# Altium PCB HoloCubic_211230.PcbDoc
Units mm, origin at the board's own origin, x right, y up, seen from the top; angles counter-clockwise.
Board outline 43 x 29.5 mm, 2 copper layers (Top Layer, Bottom Layer); 31 components, 41 nets, 150 pads, 34 vias.
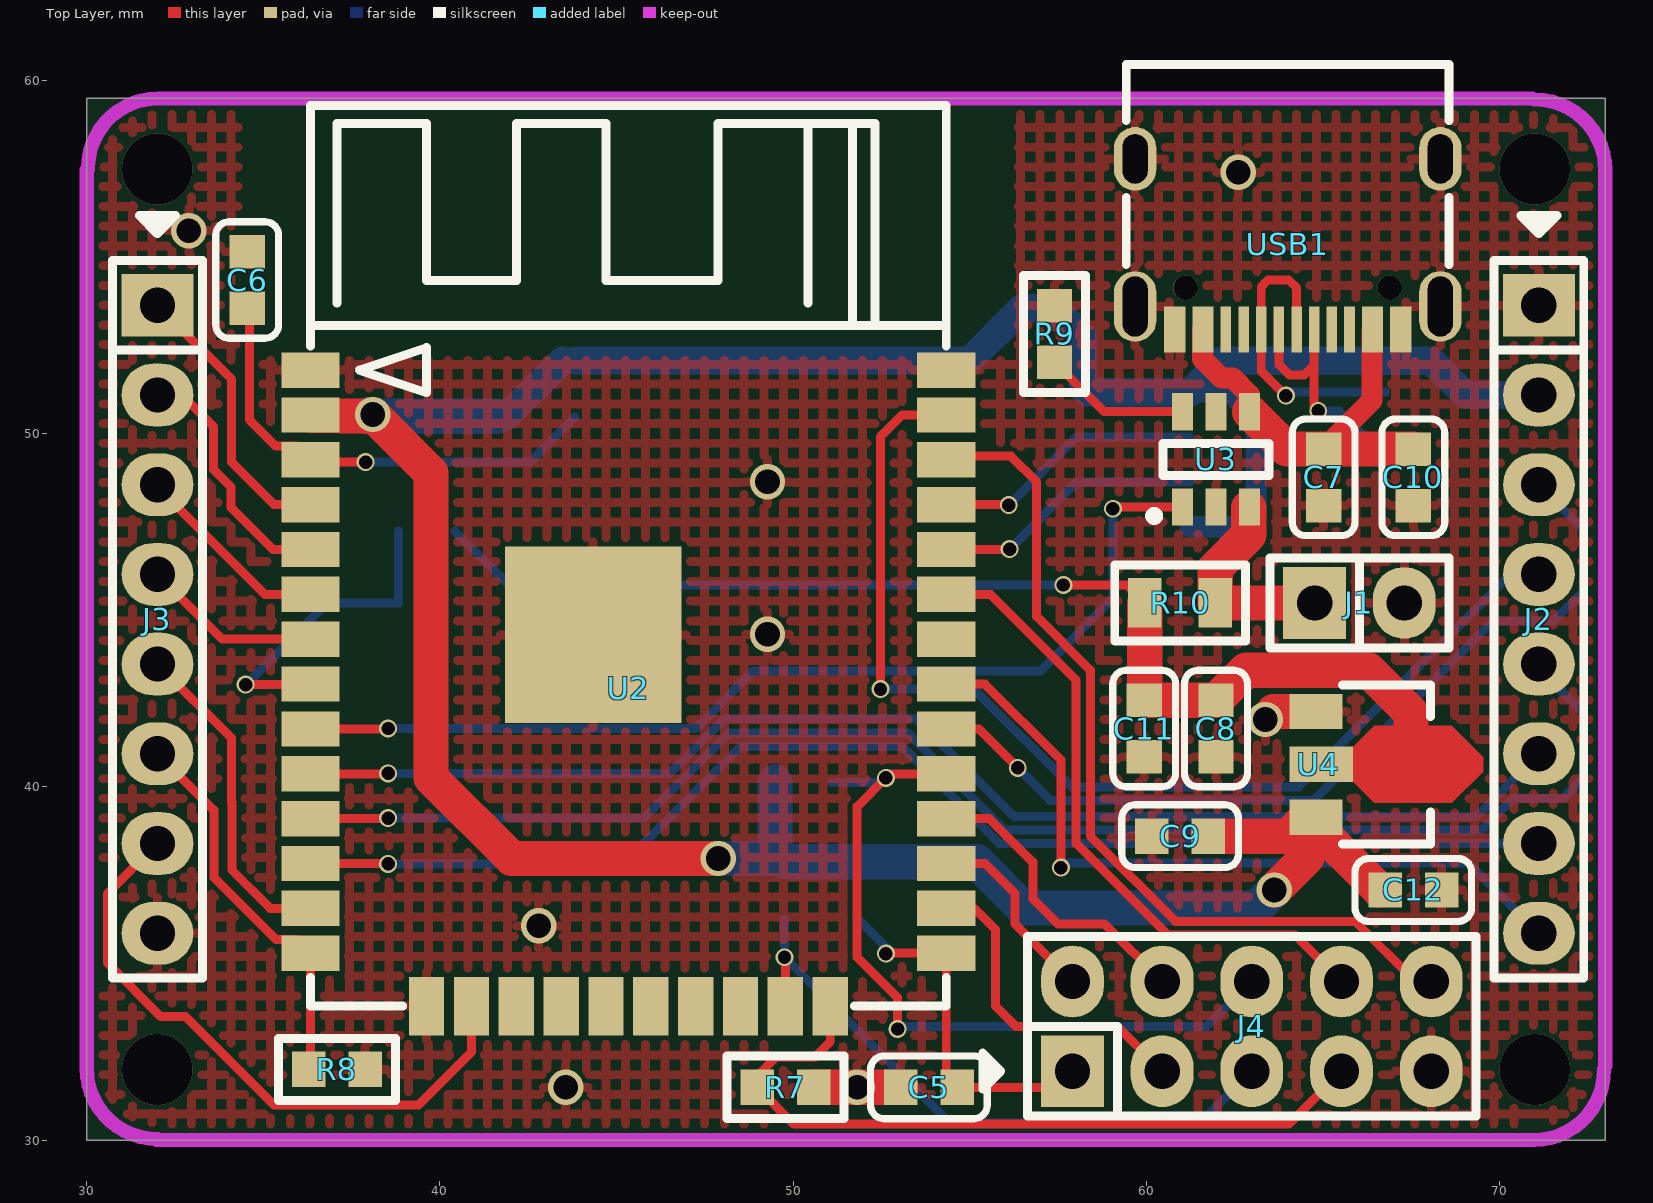
[diagram p0: Top Layer view]
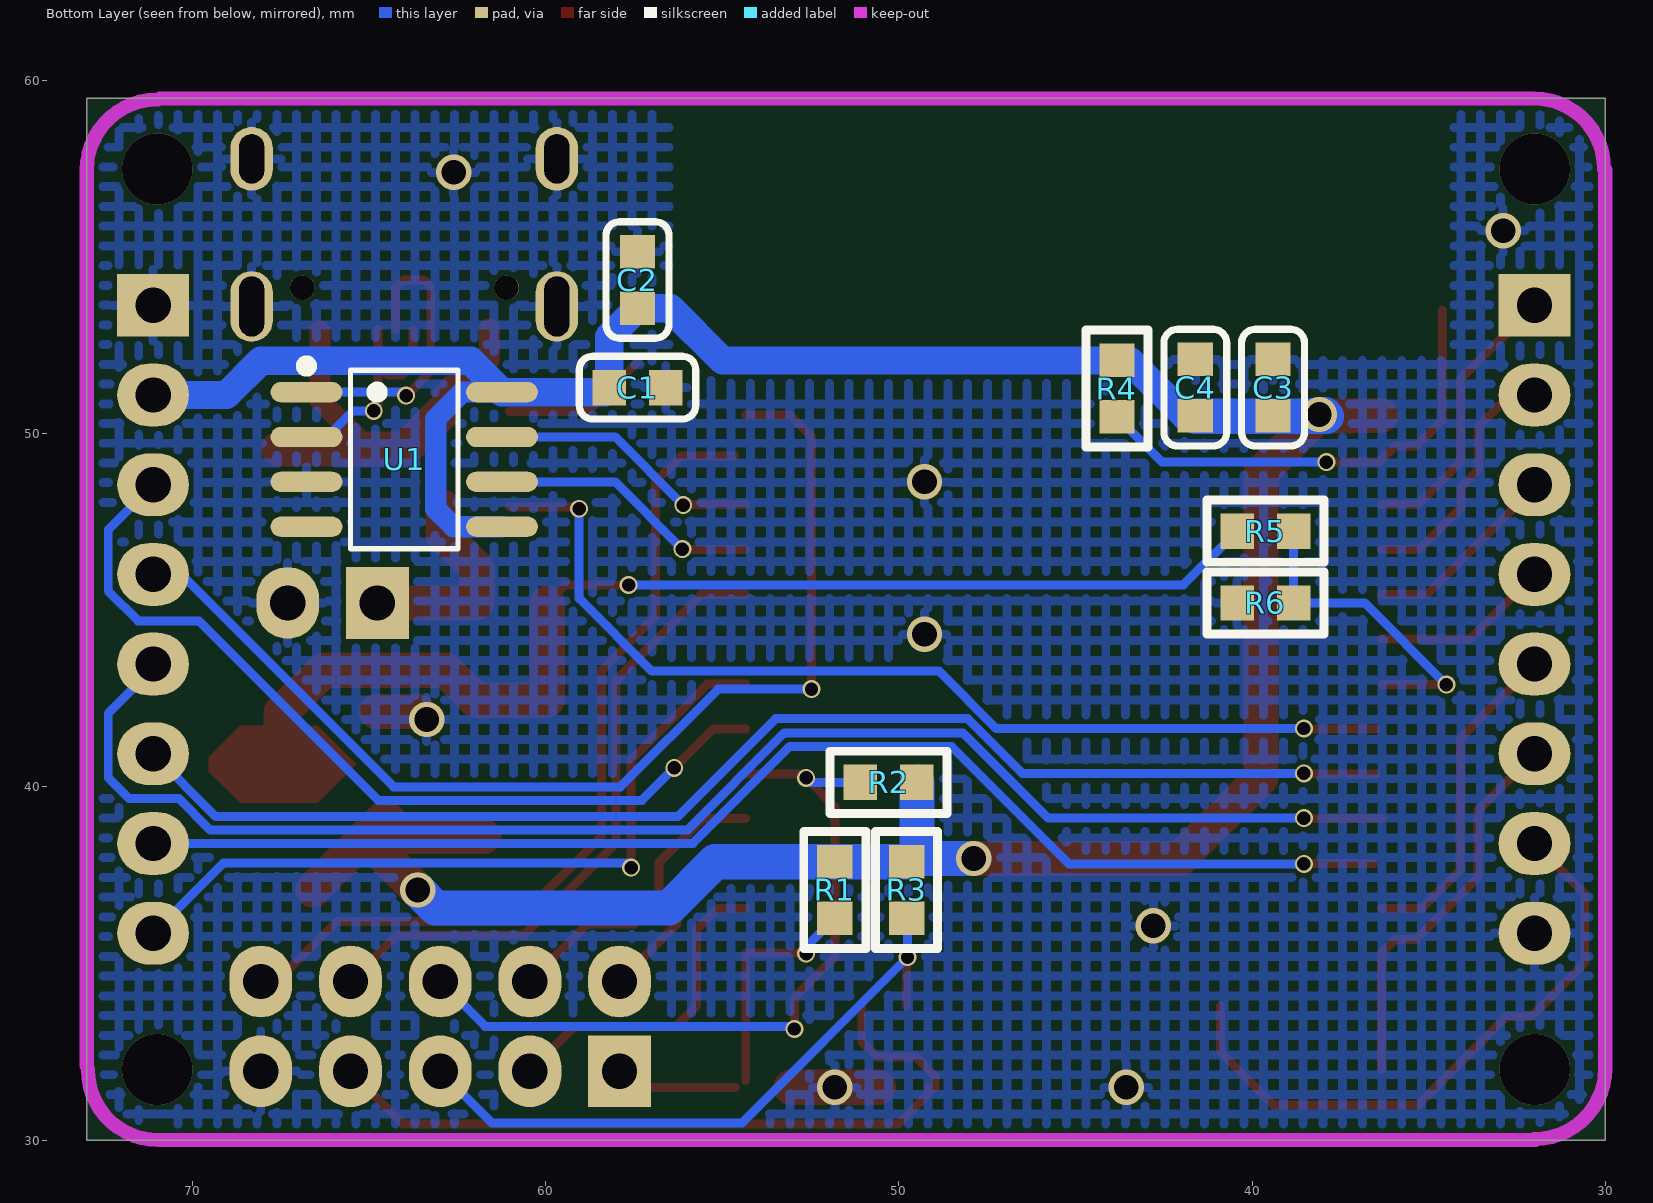
[diagram p1: Bottom Layer view, seen from below]
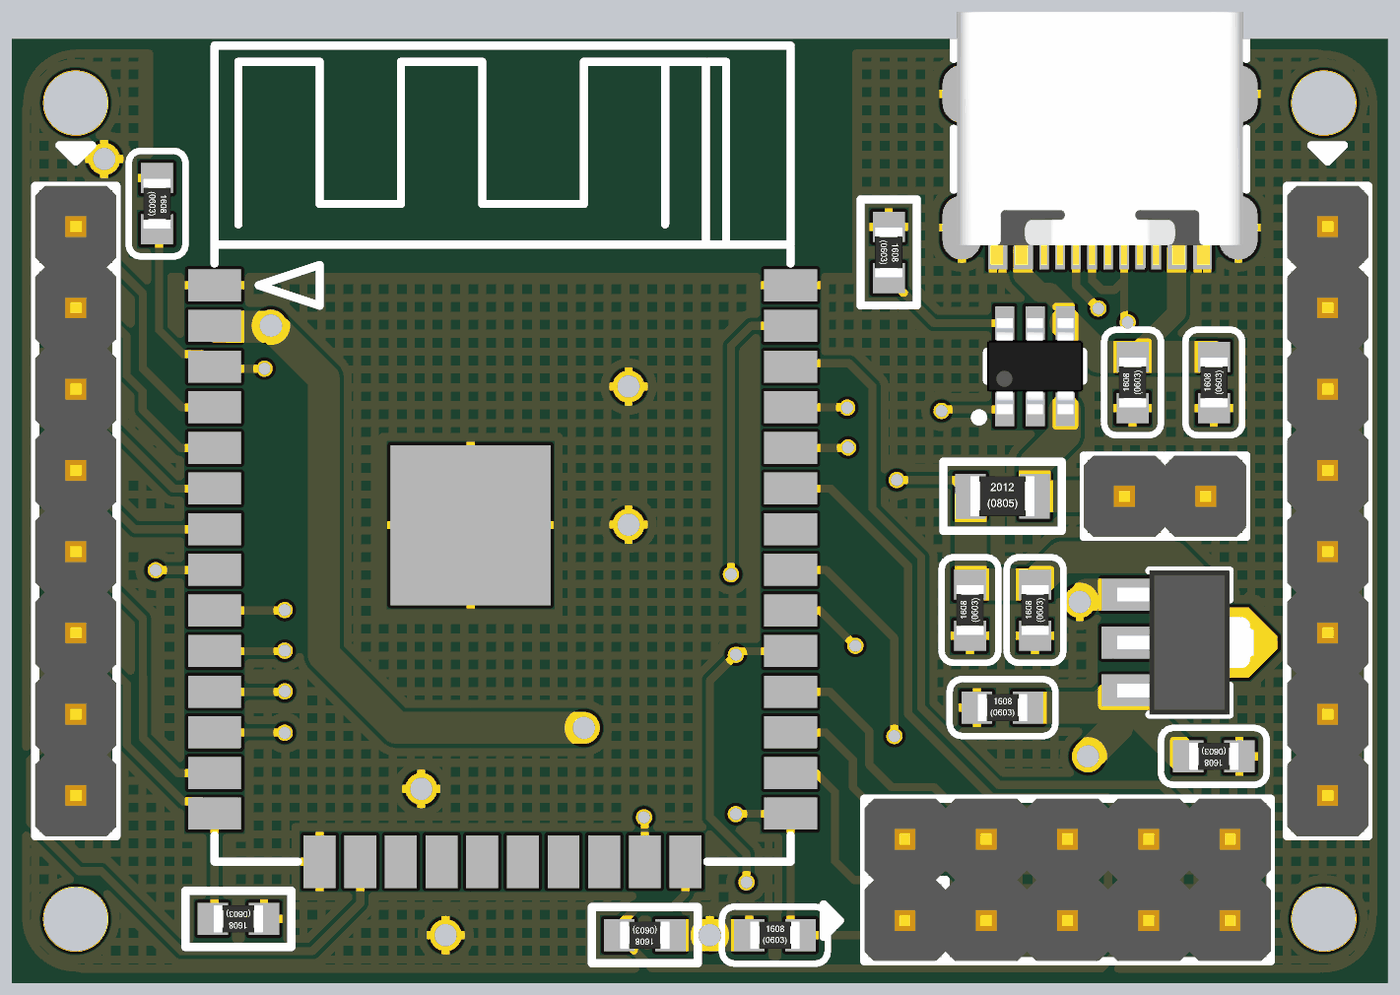
[diagram p2: 3D render of the assembled board from above, using the file's embedded part models]
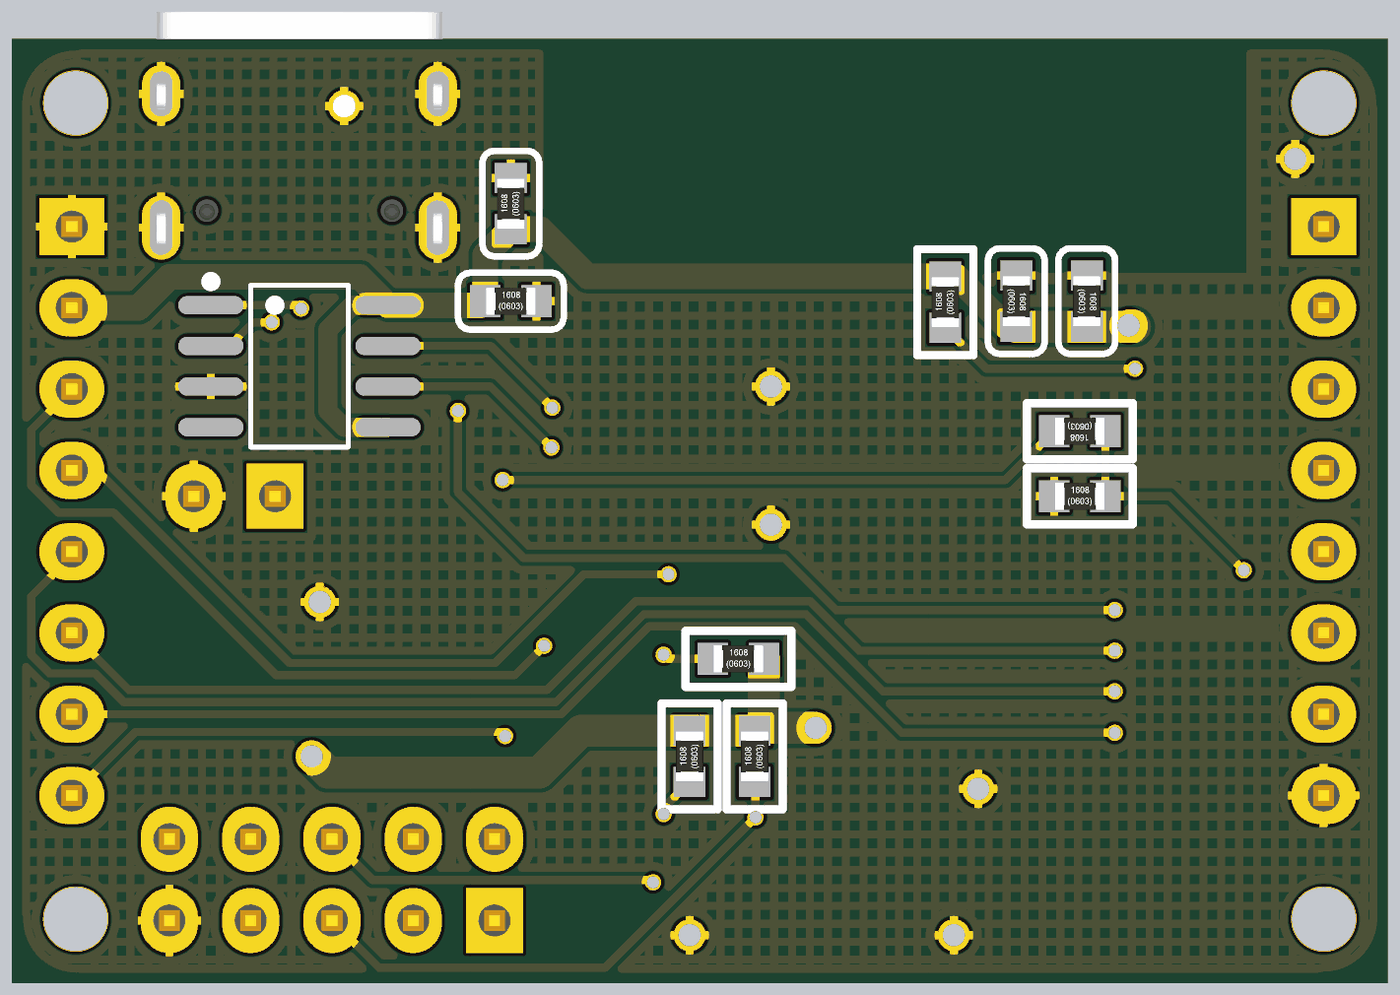
[diagram p3: 3D render of the assembled board from below, using the file's embedded part models]

## Layer stack, top to bottom
Top Layer: signal copper 0.0356
Dielectric: dielectric 0.32, FR-4, Dk 4.8
Bottom Layer: signal copper 0.0356

## Board outline
30,30 30,59.5 73,59.5 73,30

## Design rules (kind name [scope] priority, off if disabled: settings)
Clearance [All] p1: gap=0.127
HoleToHoleClearance [All] p1: gap=0.127 allowstackedmicrovias=TRUE
MinimumSolderMaskSliver [All] p1: minsoldermaskwidth=0.051
PolygonConnect [All] p1: connectstyle=Relief reliefconductorwidth=0.254 reliefentries=4 polygonreliefangle="90 Angle"
RoutingVias [All] p1: holewidth=0.711 width=1.27 viastyle="Through Hole" minholewidth=0.711 minwidth=1.27 maxholewidth=0.711 maxwidth=1.27
SilkToSilkClearance [All] p1: silktosilkclearance=0.127
SilkscreenOverComponentPads [All] p1: minsilkscreentomaskgap=0.076
SolderMaskExpansion [All] p1: expansion=0.102
Width [All] p1: maxlimit=1 minlimit=0.254 preferedwidth=0.254
24 further rules are at their usual default settings.

## Classes and differential pairs
component class HoloCubicCh340n_211230: C1 C2 U1
component class HoloCubicConnect_211230: J1 J2 J3 J4 USB1
component class HoloCubicMCU_211230: C3 C4 C5 C6 R1 R2 R3 R4 R5 R6 R7 R8 U2
component class HoloCubicPower_211230: C7 C8 C9 C10 C11 C12 R9 R10 U3 U4

## Components (designator, comment, footprint, x,y, rotation, side; value= is the part's Value field where it differs from the comment)
C1 "0.1u" C0603 57.404,51.308 r180 bottom
C2 "10u" C0603 57.404,54.356 r90 bottom
C3 "0.1u" C0603 39.408,51.308 r270 bottom
C4 "10u" C0603 41.609,51.308 r270 bottom
C5 "0.1u" C0603 53.848,31.496 r0 top
C6 "0.1u" C0603 34.544,54.356 r270 top
C7 "0.1u" C0603 65.024,48.768 r90 top
C8 "0.1u" C0603 61.976,41.656 r90 top
C9 "0.1u" C0603 60.96,38.608 r0 top
C10 "10u" C0603 67.564,48.768 r90 top
C11 "10u" C0603 59.944,41.656 r90 top
C12 "10u" C0603 67.564,37.084 r180 top
J1 "HDR1x2" PIN-2-2.54-1.0 66.04,45.212 r0 top
J2 "HDR1x8" PIN-8-2.54-1.0 71.12,44.75 r270 top
J3 "HDR1x8" PIN-8-2.54-1.0 32.004,44.75 r270 top
J4 "HDR2x5" PIN-2x5-2.54-1.0 62.992,33.223 r0 top
R1 "10k" R0603 51.816,37.084 r90 bottom
R2 "10k" R0603 50.292,40.132 r180 bottom
R3 "10k" R0603 49.784,37.084 r90 bottom
R4 "10k" R0603 43.827,51.278 r90 bottom
R5 "10k" R0603 39.624,47.244 r0 bottom
R6 "10k" R0603 39.624,45.212 r180 bottom
R7 "10k" R0603 49.784,31.496 r180 top
R8 "10k" R0603 37.084,32.004 r180 top
R9 "4.7k" R0603 57.404,52.832 r270 top
R10 "0R" R0805 60.96,45.212 r0 top
U1 "CH340N" SOP-8_L5.0-W4.0-P1.27-LS6.0-BL 64.008,49.276 r270 bottom
U2 "ESP32-WROOM-32" WIFIM-SMD_ESP-32S 44.704,44.704 r270 top
U3 "TP4059" SOT-23-6 61.976,49.276 r0 top
U4 "HT7333-3" SOT-89 66.802,40.64 r270 top
USB1 "KH-TYPE-C-16P" USB-C-SMD_KH-TYPE-C-16P 64.008,55.372 r180 top

## Footprints (in the part's own frame and the unit in brackets; to place one, negate y for a bottom-side part, rotate by r counter-clockwise, add the part's x,y. Pads: shape width x height; smd on the part's side, far side on the other; paste and mask are expansions set on the pad)
C0603 [mm] "SMD, 0603"
  rect 0.95x1 smd: 1(-0.8,0) 2(0.8,0)
  silkscreen extent -1.65,-0.89 1.65,0.89, body extent -0.77,-0.43 0.77,0.43, height 0.45
PIN-2-2.54-1.0 [mil] "Pin Header"
  rect 70x80 hole 39.37: 1(-50,0)
  oval 70x80 hole 39.37: 2(50,0)
  silkscreen extent -100,-50 100,50, body extent -100,-50 100,50, height 398
PIN-2x5-2.54-1.0 [mil] "Pin Header"
  rect 70x80 hole 39.37: 1(-200,-50)
  oval 70x80 hole 39.37: 2(-200,50) 3(-100,-50) 4(-100,50) 5(0,-50) 6(0,50) 7(100,-50) 8(100,50) 9(200,-50) 10(200,50)
  silkscreen extent -300,-100 250,100, body extent -250,-100 250,100, height 398
PIN-8-2.54-1.0 [mil] "Pin Header"
  rect 70x80 hole 39.37: 1(-350,0)
  oval 70x80 hole 39.37: 2(-250,0) 3(-150,0) 4(-50,0) 5(50,0) 6(150,0) 7(250,0) 8(350,0)
  silkscreen extent -450,-50 400,50, body extent -400,-50 400,50, height 398
R0603 [mm] "SMD, 0603"
  rect 0.95x1 smd: 1(-0.8,0) 2(0.8,0)
  silkscreen extent -1.66,-0.88 1.66,0.88, body extent -0.77,-0.43 0.77,0.43, height 0.45
R0805 [mm] "SMD, 0805"
  rect 0.95x1.4 smd: 1(-1,0) 2(1,0)
  silkscreen extent -1.85,-1.08 1.85,1.08, body extent -1,-0.62 1,0.63, height 0.45
SOP-8_L5.0-W4.0-P1.27-LS6.0-BL [mm]
  oval 0.574x2.036 smd: 1(-1.905,-2.768) 2(-0.635,-2.768) 3(0.635,-2.768) 4(1.905,-2.768) 5(1.905,2.768) 6(0.635,2.768) 7(-0.635,2.768) 8(-1.905,2.768)
  silkscreen extent -2.79,-2.92 2.53,1.52
SOT-23-6 [mm] "SOT-23-6"
  rect 0.6x1.05 smd: 1(-0.95,-1.35) 2(0,-1.35) 3(0.95,-1.35) 4(0.95,1.35) 5(0,1.35) 6(-0.95,1.35)
  silkscreen extent -1.88,-1.73 1.5,0.45, body extent -1.5,-1.5 1.5,1.5, height 1.3
SOT-89 [mm] "SOT-89, TO-243AA"
  rect 1x1.5 smd: 1(-1.5,-2) 3(1.5,-2)
  rect 1x1.8 smd: 2(0,-1.85)
  Top Layer region: -1.1,-0.35 1.1,-0.35 1.1,1.85 -1.1,1.85
  Top Layer region: -0.198,1.848 0.202,1.848 0.202,2.748 -0.198,2.748
  Top Layer region: 0.202,0.952 1.1,1.85 0.202,2.748 -0.696,1.85
  Top Layer region: -0.202,0.952 0.696,1.85 -0.202,2.748 -1.1,1.85
  Top Layer region: 0,-1.45 1.1,-0.35 0,0.75 -1.1,-0.35
  silkscreen extent -2.25,-1.25 2.25,1.25, body extent -2.25,-2.25 2.25,2, height 1.54
USB-C-SMD_KH-TYPE-C-16P [mm]
  oval 1.2x2 hole 0.7 slot 1.7 at 90 deg: 1(-4.32,1.765) 2(4.32,1.765)
  oval 1.2x1.8 hole 0.7 slot 1.4 at 90 deg: 3(-4.32,-2.415) 4(4.32,-2.415)
  rect 0.3x1.3 smd: A1(-3.35,2.415) A4(-2.55,2.415) A5(-1.25,2.415) A6(-0.25,2.415) A7(0.25,2.415) A8(1.25,2.415) A9(2.55,2.415) A12(3.35,2.415) B1(3.05,2.415) B4(2.25,2.415) B5(1.75,2.415) B6(0.75,2.415) B7(-0.75,2.415) B8(-1.75,2.415) B9(-2.25,2.415) B12(-3.05,2.415)
  round 0.7 hole 0.7 unplated: ""(-2.89,1.235) ""(2.89,1.235)
  silkscreen extent -4.57,-5.08 4.57,0.57, body extent -4.47,-4.98 4.47,2.92, height 3.16
WIFIM-SMD_ESP-32S [mm]
  rect 1x1.65 smd: 1(-7.1,-8.365) 2(-5.83,-8.365) 3(-4.56,-8.365) 4(-3.29,-8.365) 5(-2.02,-8.365) 6(-0.75,-8.365) 7(0.52,-8.365) 8(1.79,-8.365) 9(3.06,-8.365) 10(4.33,-8.365) 11(5.6,-8.365) 12(6.87,-8.365) 13(8.14,-8.365) 14(9.41,-8.365) 25(9.41,9.635) 26(8.14,9.635) 27(6.87,9.635) 28(5.6,9.635) 29(4.33,9.635) 30(3.06,9.635) 31(1.79,9.635) 32(0.52,9.635) 33(-0.75,9.635) 34(-2.02,9.635) 35(-3.29,9.635) 36(-4.56,9.635) 37(-5.83,9.635) 38(-7.1,9.635)
  rect 1.65x1 smd: 15(10.91,-5.08) 16(10.91,-3.81) 17(10.91,-2.54) 18(10.91,-1.27) 19(10.91,0) 20(10.91,1.27) 21(10.91,2.54) 22(10.91,3.81) 23(10.91,5.08) 24(10.91,6.35)
  rect 5x5 smd: 39(0.395,-0.365)
  silkscreen extent -14.59,-8.36 10.91,9.64

## Part data
C4 C10 C11 C12: library part 0.1u
J1 J2 J3 J4: "Connector"
R9 R10: library part 10k

## Via types
v1: diameter 0.508, hole 0.381, Top Layer to Bottom Layer, 19 vias
v2: diameter 1, hole 0.7, Top Layer to Bottom Layer, 11 vias
v3: diameter 2, hole 2, Top Layer to Bottom Layer, 4 vias

## Nets (pads, with @x,y where several pads share a name; then routed paths per layer and width w, separated by ;. In a path a pad name is that pad's centre, name@x,y a point inside that pad or via, vN(x,y) a via of type N, cw(c..) or ccw(c..) an arc to the next point about the centre after c; other vN are vias at no path point)
CH340RX: U1.7 U2.35 | length 7.7
  Top Layer w0.254: U2.35 v1@56.071,47.994
  Bottom Layer w0.254: v1(56.109,47.981) 58.039,49.911 U1.7
CH340TX: U1.6 U2.34 | length 7.6
  Top Layer w0.254: U2.34 v1@56.046,46.724
  Bottom Layer w0.254: v1(56.134,46.736) 58.039,48.641 U1.6
ESP32EN: C6.2 R4.1 U2.3 | length 13.3
  Top Layer w0.254: C6.2@34.608,53.492 34.608,50.401 35.356,49.653 35.95,49.653 U2.3 36.403,49.2 v1(37.9,49.2)
  Bottom Layer w0.254: v1(37.9,49.2) 42.549,49.2 R4.1
GND: C1.2 C2.2 C3.1 C4.1 C5.1 C6.1 C7.1 C8.1 C9.1 C10.1 C11.1 C12.1 J1.2 J2.1 J3.8 J4.9 R6.1 R7.1 R8.1 R9.1 U1.3 U2.1 U2.15 U2.38 U2.39 U3.2 U4.1 USB1.1 USB1.2 USB1.3 USB1.4 USB1.A1 USB1.A12 USB1.B1 USB1.B12 | length 3.7
  Top Layer w1: R7.1 v2(51.816,31.496) C5.1 ; v2@63.603,42.14 U4.1
  other v2: 43.561,31.496 42.799,36.068 63.373,41.91 49.276,44.323 49.276,48.641 32.893,55.753 62.611,57.404
IO0: C5.2 J4.1 R1.1 U2.25 | length 9.4
  Top Layer w0.254: v1@52.642,35.294 U2.25 C5.2@54.339,31.695 ; C5.2 J4.1@57.455,31.496
  Bottom Layer w0.254: R1.1 52.629,35.471 v1(52.629,35.281)
IO2: J4.7 R7.2 U2.24 | length 22
  Top Layer w0.254: R7.2@49.17,31.496 R7.2 ; U2.24@51.054,33.38 U2.24 51.054,32.791 50.622,32.36 49.53,32.36 48.984,31.814 R7.2 ; J4.7 64.033,30.455 50.025,30.455 R7.2
IO4: J4.3 U2.26 | length 9.2
  Top Layer w0.254: U2.26 55.13,36.564 55.728,35.966 55.728,33.807 56.312,33.223 59.182,33.223 60.176,32.229 J4.3@60.176,31.953
IO5: J4.6 R2.1 U2.29 | length 21.5
  Top Layer w0.254: v1(52.629,40.259) 51.816,39.446 51.816,35.179 52.959,34.036 v1(52.959,33.147) ; v1@52.744,40.374 U2.29
  Bottom Layer w0.254: R2.1 v1@52.502,40.132 ; v1(52.959,33.147) 53.035,33.223 61.722,33.223 J4.6
IO6: U2.20
IO7: U2.21
IO8: U2.22
IO9: U2.17
IO10: U2.18
IO11: U2.19
IO12: J3.6 R8.2 U2.14 | length 11.1
  Top Layer w0.254: J3.6 33.6,39.344 33.6,37.439 35.356,35.683 35.95,35.683 U2.14 R8.2@36.339,32.004
IO13: J3.7 U2.16 | length 17.9
  Top Layer w0.254: J3.7 30.581,36.977 30.581,35.019 32.1,33.5 32.8,33.5 35.3,31 39.4,31 40.894,32.494 U2.16
IO14: J3.5 U2.13 | length 9.4
  Top Layer w0.254: J3.5 34.1,41.384 34.1,39.57 34.108,39.562 34.108,37.65 35.194,36.564 U2.13
IO15: J4.5 R3.1 U2.23 | length 18.2
  Top Layer w0.254: U2.23 v1@49.784,35.154
  Bottom Layer w0.254: R3.1@49.759,36.259 v1(49.759,35.179) 54.458,30.48 61.519,30.48 J4.5
IO16: J4.2 U2.27 | length 5.5
  Top Layer w0.254: U2.27 55.435,37.834 56.286,36.982 56.286,36.119 J4.2
IO17: J4.4 U2.28 | length 9.3
  Top Layer w0.254: U2.28 55.562,39.104 56.794,37.871 56.794,36.83 57.506,36.119 58.826,36.119 J4.4 ; J4.4@59.893,34.493 J4.4@59.893,35.179
IO18: J2.3 U2.30 | length 24.9
  Top Layer w0.254: U2.30 55.257,41.644 v1(56.363,40.538)
  Bottom Layer w0.254: v1(56.363,40.538) 57.277,39.624 64.745,39.624 69.825,44.704 71.547,44.704 72.39,45.547 72.39,47.29 J2.3
IO19: J2.8 U2.31 | length 21.6
  Top Layer w0.254: U2.31 55.435,42.914 57.582,40.767 v1(57.582,37.719)
  Bottom Layer w0.254: v1(57.582,37.719) 57.709,37.846 69.134,37.846 J2.8
IO21: J4.8 U2.33 | length 18.4
  Top Layer w0.254: U2.33 55.587,45.454 58.014,43.028 58.014,38.405 60.604,35.814 64.211,35.814 J4.8
IO22: J4.10 U2.36 | length 24.6
  Top Layer w0.254: U2.36@54.65,49.367 56.17,49.367 56.896,48.641 56.896,44.831 58.42,43.307 58.42,38.608 60.833,36.195 65.913,36.195 67.615,34.493 J4.10
IO23: J2.4 U2.37 | length 31.5
  Top Layer w0.254: v1(52.476,42.774) 52.476,49.911 53.099,50.534 U2.37
  Bottom Layer w0.254: v1(52.476,42.774) 55.118,42.774 57.887,40.005 64.313,40.005 70.328,46.02 J2.4
IO25: J2.6 U2.10 | length 37.3
  Top Layer w0.254: U2.10@36.478,40.374 v1@38.659,40.374
  Bottom Layer w0.254: v1(38.532,40.386) 46.507,40.386 48.057,41.935 53.492,41.935 56.266,39.162 64.516,39.162 69.342,39.162 J2.6
IO26: J2.5 U2.11 | length 42.5
  Top Layer w0.254: U2.11 v1@38.52,39.104
  Bottom Layer w0.254: v1(38.532,39.116) 45.776,39.116 48.189,41.529 53.244,41.529 55.992,38.781 69.5,38.781 70.394,39.675 71.806,39.675 72.39,40.259 72.39,42.083 71.12,43.353 J2.5
IO27: J2.7 U2.12 | length 37.2
  Top Layer w0.254: U2.12@36.58,37.834 v1@38.659,37.834
  Bottom Layer w0.254: v1(38.532,37.821) 45.187,37.821 48.514,41.148 53.086,41.148 55.834,38.4 J2.7
IO32: R5.1 R6.2 U2.8 | length 9.1
  Top Layer w0.254: v1(34.5,42.9) U2.8@36.325,42.9
  Bottom Layer w0.254: v1(34.5,42.9) 36.812,45.212 R6.2 R5.1
IO33: U2.9 U3.1 | length 28.7
  Top Layer w0.254: U2.9@36.504,41.644 v1@38.659,41.644 ; v1@59.102,47.926 U3.1
  Bottom Layer w0.254: v1(38.532,41.656) 47.239,41.656 48.864,43.282 56.998,43.282 59.055,45.339 v1(59.055,47.879)
IO34: J3.3 U2.6 | length 5.7
  Top Layer w0.254: J3.3 32.004,48.496 35.046,45.454 U2.6
IO35: J3.4 U2.7 | length 5.1
  Top Layer w0.254: J3.4 33.84,44.184 U2.7
IO36: J3.1 U2.4 | length 8
  Top Layer w0.254: J3.1 34.1,51.544 34.1,49.2 35.306,47.994 U2.4
IO39: J3.2 U2.5 | length 7.2
  Top Layer w0.254: J3.2 32.692,51.1 33.592,50.2 33.592,48.99 34.092,48.49 34.092,47.908 35.276,46.724 U2.5
NetR9_2: R9.2 U3.6 | length 4.2
  Top Layer w0.254: R9.2 58.81,50.626 U3.6
USB_5V: C7.2 C10.2 U3.4 USB1.A4 USB1.A9 USB1.B4 USB1.B9 | length 12.1
  Top Layer w0.6: USB1.A9@61.595,52.959 61.595,52.121 62.138,51.578 62.453,51.578 62.926,51.105 U3.4 ; C7.2 66.396,50.94 USB1.B9@66.396,52.908
  Top Layer w1: U3.4 63.984,49.568 C7.2 C10.2
USB_D+: U1.1 USB1.A6 USB1.B6 | length 8.4
  Top Layer w0.254: v1(63.957,51.079) 63.258,51.779 USB1.B6 63.258,54.165 63.449,54.356 64.033,54.356 64.258,54.131 USB1.A6
  Bottom Layer w0.254: v1@64.059,51.181 U1.1
USB_D-: U1.2 USB1.A7 USB1.B7 | length 6.2
  Top Layer w0.254: USB1.A7 63.758,51.964 64.059,51.664 64.465,51.664 64.758,51.956 ; USB1.B7 64.758,51.956 ; v1(64.872,50.648) 64.758,50.761 64.758,51.956
  Bottom Layer w0.254: v1(64.872,50.648) 65.456,50.648 U1.2@66.192,49.911
V3.3: C1.1 C2.1 C3.2 C4.2 C9.2 C12.2 J2.2 R1.2 R2.2 R3.2 R4.2 U1.5 U1.8 U2.2 U4.3 | length 92.5
  Top Layer w0.8: C9.2@61.722,38.608 C9.2
  Top Layer w1: U2.2@36.355,50.518 v2@37.9,50.5 ; v2(38.1,50.546) 39.751,48.895 39.751,40.259 42.037,37.973 v2(47.879,37.973) ; C9.2 64.016,38.608 U4.3@64.548,39.14 ; v2(63.627,37.084) 64.548,38.005 U4.3@64.548,39.14 ; C12.2@66.604,37.084 U4.3@64.548,39.14
  Bottom Layer w0.6: U1.5 62.611,47.371 63.119,47.879 63.119,50.419 62.357,51.181 U1.8
  Bottom Layer w0.8: C4.2@41.601,50.5 41.901,50.5 R4.2@43.479,52.078 ; R4.2 54.999,52.078 56.477,53.556 C2.1 58.204,52.756 C1.1 58.331,51.181 U1.8 62.129,52.07 68.072,52.07 69.042,51.1 J2.2
  Bottom Layer w1: v2(38.1,50.546) 37.946,50.546 37.9,50.5 C4.2@41.601,50.5 ; v2(47.879,37.973) R3.2@49.695,37.973 ; R2.2 49.492,38.176 R3.2@49.695,37.973 ; v2(63.627,37.084) 63.119,36.576 56.515,36.576 55.207,37.884 R1.2 R3.2 R3.2@49.695,37.973
VBAT: J1.1 R10.2 U3.3 | length 5.9
  Top Layer w1: U3.3@62.903,47.903 62.903,47.141 61.96,46.198 R10.2 J1.1
VBATSWITH: C8.2 C11.2 R5.2 R10.1 U4.2 | length 33.2
  Top Layer w0.254: v1(57.658,45.72) 59.452,45.72 R10.1
  Top Layer w1: R10.1 59.96,42.472 59.976,42.456 C8.2 62.827,43.307 66.294,43.307 67.5,42.101 67.5,40.438
  Bottom Layer w0.254: R5.2 41.948,45.72 v1(57.658,45.72)
pads on no net: U1.4 U2.32 U3.5 USB1. USB1.A5 USB1.A8 USB1.B5 USB1.B8
copper on no net:
  other v3: 32,32 71,32 32,57.5 71,57.5

## Polygon pours and split planes (outlines as drawn)
GND on Bottom Layer "Top Layer-No Net" (hatched 90Degree grid 0.559 track 0.254, remove dead copper): 30,59.5 34.29,59.5 34.29,52.07 56.515,52.07 56.515,59.5 73,59.5 73,30 30,30
GND on Top Layer "Top Layer-No Net" (hatched 90Degree grid 0.559 track 0.254, remove dead copper): 30,59.5 34.29,59.5 34.29,52.07 56.388,52.07 56.388,59.5 73,59.5 73,30 30,30

## Keep-outs
Keep-Out Layer:
  lines w0.4: 30,31.976 30,57.469 ; 30,32.031 ccw(c32,32.031) 32,30.031 ; 30.031,57.5 cw(c32.031,57.5) 32.031,59.5 70.929,59.5 ; 31.976,30 70.894,30 ; 70.969,30 ccw(c70.969,32) 72.969,32 ; 71,59.469 cw(c71,57.469) 73,57.469 ; 73,32.106 73,57.429